# Altium PCB ToolDoorController_edge.PcbDoc
Units mm, origin at the board's own origin, x right, y up, seen from the top; angles counter-clockwise.
Board outline 70 x 120 mm, 2 copper layers (Top Layer, Bottom Layer); 35 components, 53 nets, 280 pads, 295 vias.
Unrouted connection lines stored in the file: 57.
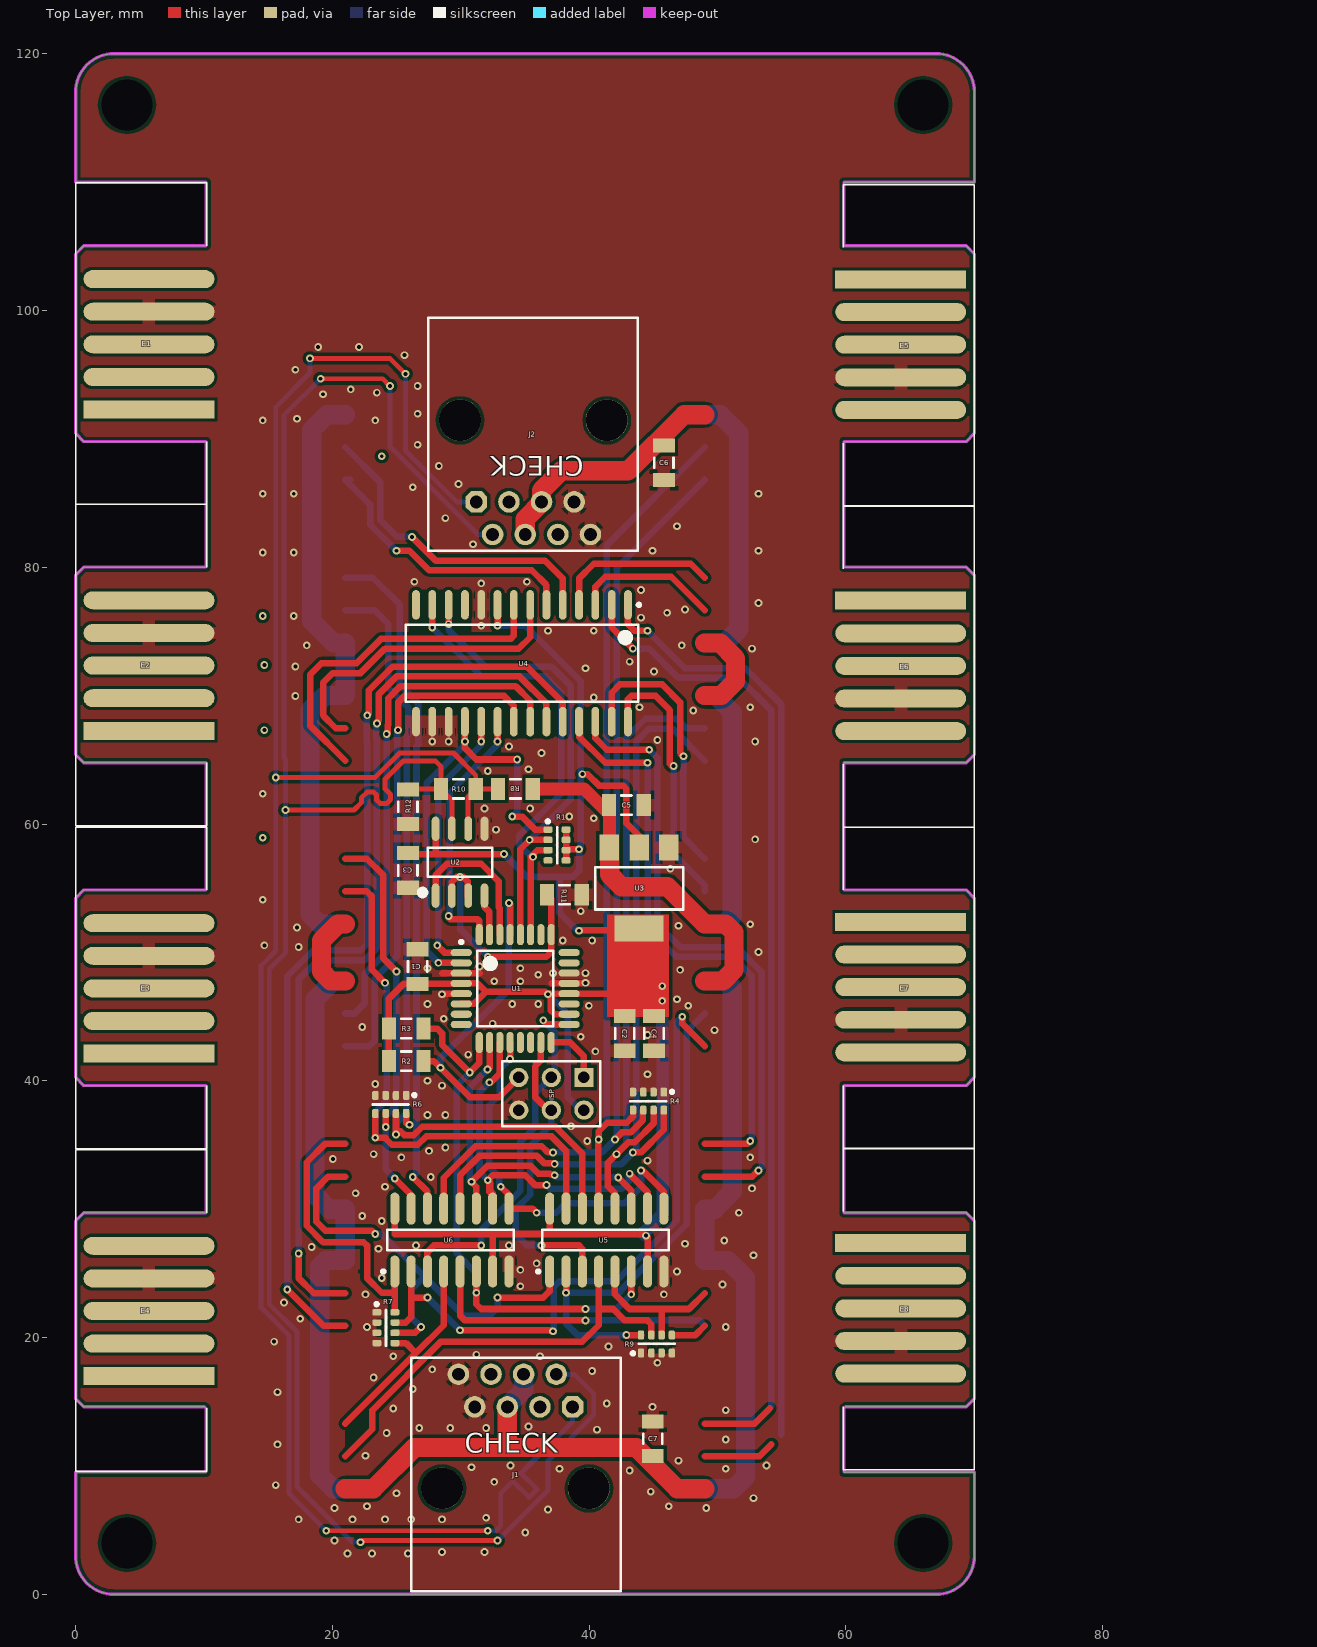
[diagram p0: Top Layer view]
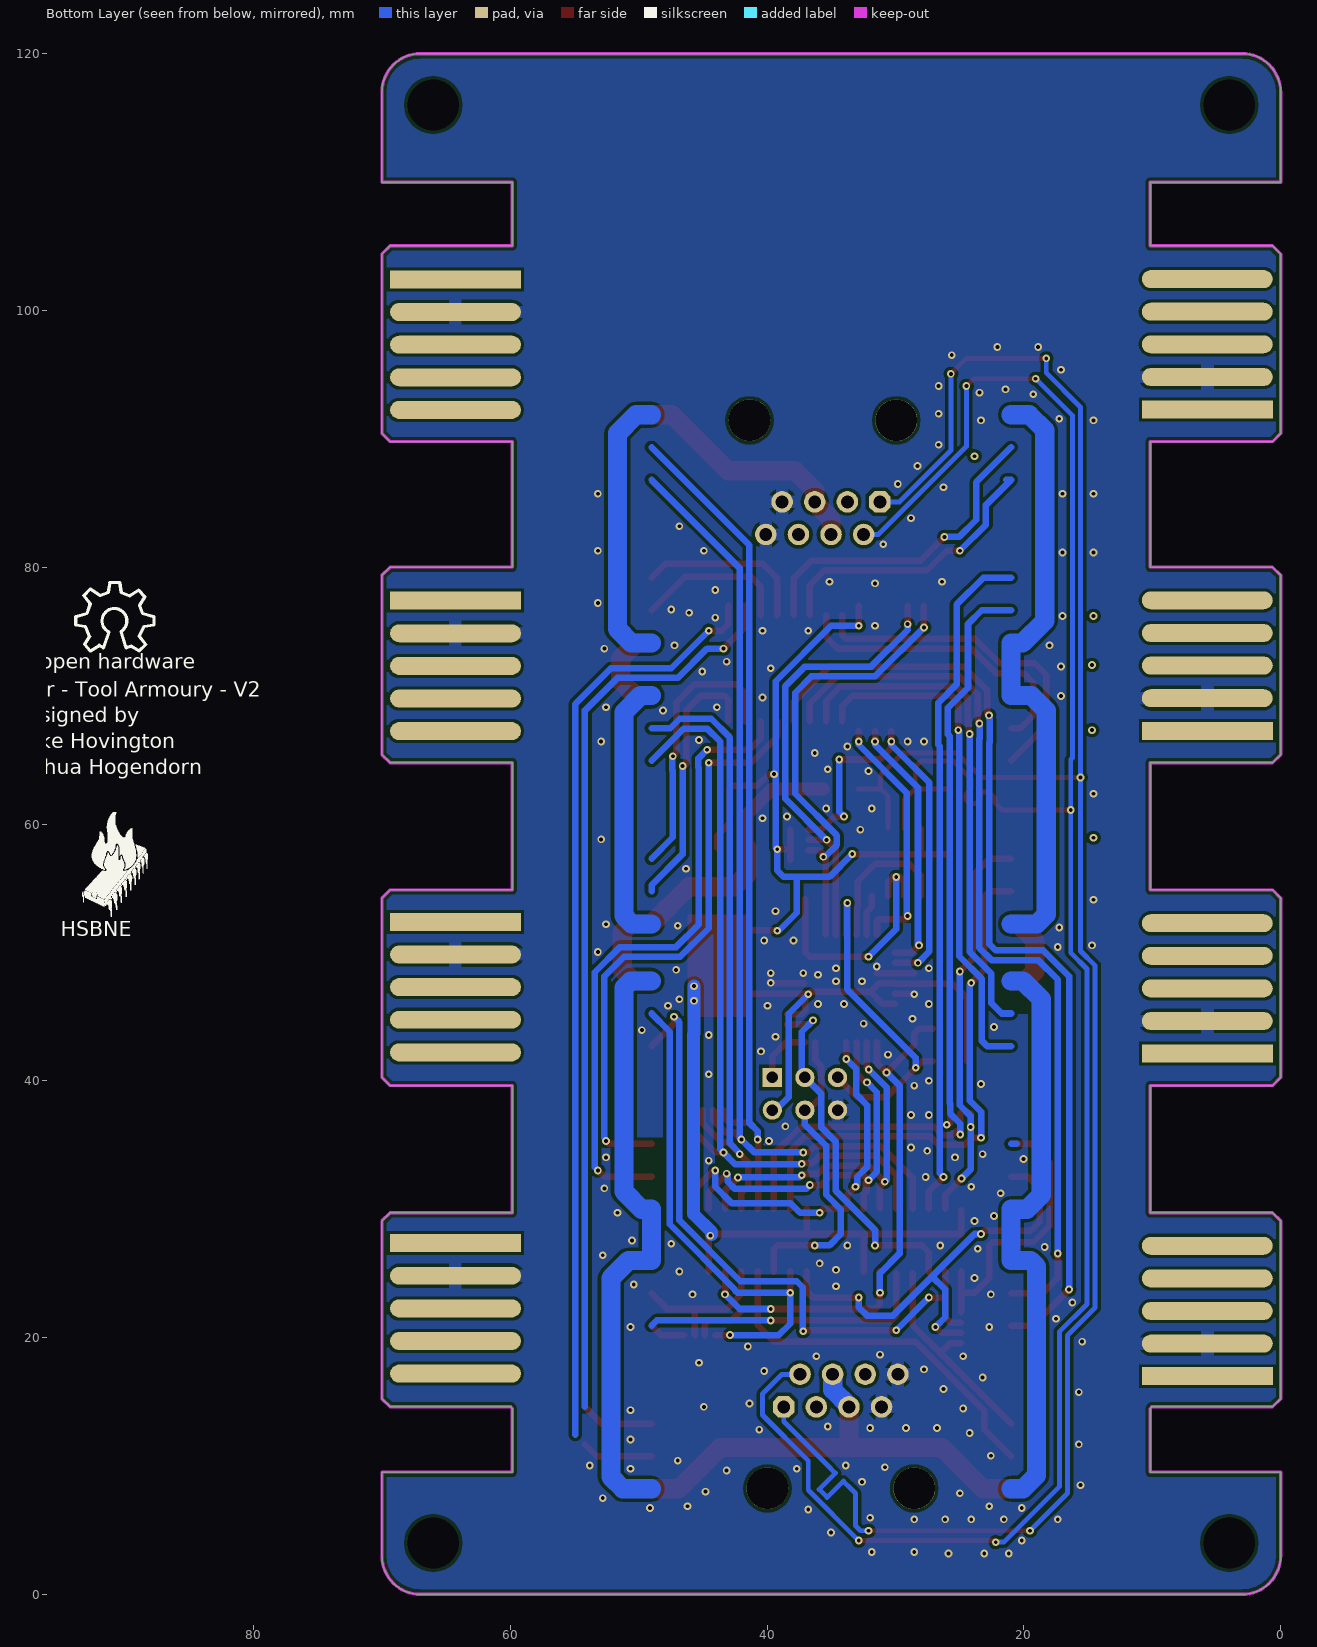
[diagram p1: Bottom Layer view, seen from below]

## Layer stack, top to bottom
Top Solder: solder mask 0.0102, Solder Resist, Dk 3.5
Top Layer: signal copper 0.0356
Dielectric1: dielectric 0.32, FR-4, Dk 4.8
Bottom Layer: signal copper 0.0356
Bottom Solder: solder mask 0.0102, Solder Resist, Dk 3.5

## Board outline
0.635,14.605 0,15.24 0,29.083 0.635,29.718 10.16,29.718 10.16,39.624 0.635,39.624 0,40.259 0,54.229 0.635,54.864 10.16,54.864 10.16,64.77 0.635,64.77 0,65.405 0,79.375 0.635,80.01 10.16,80.01 10.16,89.789 0.635,89.789 0,90.424 0,104.394 0.635,105.029 10.16,105.029 10.16,109.982 0,109.982 0,117 cw(c3,117) 3,120 67,120 cw(c67,117) 70,117 70,109.982 59.84,109.982 59.84,105.029 69.365,105.029 70,104.394 70,90.424 69.365,89.789 59.84,89.789 59.84,80.01 69.365,80.01 70,79.375 70,65.405 69.365,64.77 59.84,64.77 59.84,54.864 69.365,54.864 70,54.229 70,40.259 69.365,39.624 59.84,39.624 59.84,29.718 69.365,29.718 70,29.083 70,15.24 69.365,14.605 59.967,14.605 59.84,14.478 59.84,9.525 70,9.525 70,3 cw(c67,3) 67,0 3,0 cw(c3,3) 0,3 0,9.525 10.16,9.525 10.16,14.478 10.033,14.605

## Design rules (kind name [scope] priority, off if disabled: settings)
Clearance [All] p1: gap=0.25
DiffPairsRouting [All] p1: maxlimit=0.254 minlimit=0.254 mostfreqgap=0.254 toplayer_minwidth=0.381 toplayer_maxwidth=0.381 toplayer_prefwidth=0.381 bottomlayer_minwidth=0.381 bottomlayer_maxwidth=0.381 bottomlayer_prefwidth=0.381 maxuncoupledlength=12.7
HoleSize [All] p1: absolutevalues=TRUE maxlimit=4 minlimit=0.3 maxpercent=80.000 minpercent=20.000
MatchedLengths [InDifferentialPair('RS485')] p1: tolerance=2 checknetsindiffpair=FALSE checkdiffpairvsdiffpair=TRUE checkxsignals=TRUE checkothers=TRUE
MinimumSolderMaskSliver [(InComponent('U1') OR InComponent('U4') OR InComponent('Y1'))] p1: minsoldermaskwidth=0.045
MinimumSolderMaskSliver MinimumSolderMaskSliver_1 [All] p2: minsoldermaskwidth=0.25
PolygonConnect PolygonConnect_1 [isvia] p1: connectstyle=Direct reliefconductorwidth=0.254 reliefentries=4 polygonreliefangle="90 Angle" airgapwidth=0.254
PolygonConnect [All] p2: connectstyle=Relief reliefconductorwidth=1 reliefentries=4 polygonreliefangle="90 Angle" airgapwidth=0.254
RoutingVias [All] p1: holewidth=0.3 width=0.5 viastyle="Through Hole" minholewidth=0.2 minwidth=0.5 maxholewidth=0.711 maxwidth=1.27
SilkToSolderMaskClearance [IsPad] p1 off: minsilkscreentomaskgap=0.254 clearancetoexposedcopper=TRUE
SolderMaskExpansion [All] p1: expansion=0.102
Width [All] p1: maxlimit=1.5 minlimit=0.254 preferedwidth=0.508 minimp=50.000000 maximp=50.000000 favimp=50.000000
26 further rules are at their usual default settings.

## Classes and differential pairs
differential pair RS485: +RS485_P -RS485_N

## Components (designator, comment, footprint, x,y, rotation, side; value= is the part's Value field where it differs from the comment)
C1 "100nF" C1206 26.637,48.895 r270 top
C2 "100nF" C1206 42.766,43.688 r90 top
C3 "100nF" C1206 25.875,56.388 r90 top
C4 "1uF" C1206 45.052,43.688 r90 top
C5 "1uF" C1206 42.893,61.468 r180 top
C6 "100nF" C1206 45.814,88.138 r90 top
C7 "100nF" C1206 44.944,12.121 r270 top
E1 "Header 2x5" "CARDEDGE CWR-170-10" 0,89.789 r90 top
E2 "Header 2x5" "CARDEDGE CWR-170-10" 0,64.77 r90 top
E3 "Header 2x5" "CARDEDGE CWR-170-10" 0,39.624 r90 top
E4 "Header 2x5" "CARDEDGE CWR-170-10" 0,14.5 r90 top
E5 "Header 2x5" "CARDEDGE CWR-170-10" 69.977,104.902 r270 top
E6 "Header 2x5" "CARDEDGE CWR-170-10" 69.977,79.883 r270 top
E7 "Header 2x5" "CARDEDGE CWR-170-10" 69.977,54.864 r270 top
E8 "Header 2x5" "CARDEDGE CWR-170-10" 69.977,29.845 r270 top
ISP "ISP" HDR2X3 39.591,40.259 r180 top
J1 "rs485" RJ45 34.257,8.255 r0 top
J2 "rs485" RJ45 35.654,91.44 r180 top
R1 "10K" SO8_S 36.797,59.563 r0 top
R2 "10K" C1206 25.748,41.529 r180 top
R3 "10K" C1206 25.748,44.069 r180 top
R4 "10K" SO8_S 45.814,39.116 r270 top
R6 "10K" SO8_S 25.748,38.862 r270 top
R7 "10K" SO8_S 23.462,21.971 r0 top
R8 "390R" C1206 34.257,62.738 r0 top
R9 "10K" SO8_S 44.036,18.796 r90 top
R10 "220R" C1206 29.812,62.738 r0 top
R11 "10K" C1206 38.067,54.483 r180 top
R12 "390R" C1206 25.875,61.341 r90 top
U1 "ATmega8-16AC" 32A_N 34.238,47.184 r0 top
U2 "MAX14770EESA+" 8S1_L 29.939,57.023 r90 top
U3 "AZ1117EH-5" SOT-223 46.195,58.166 r180 top
U4 "MCP23017-E/SO" SOIC-SO28_N 34.765,72.517 r270 top
U5 "8-channel multiplexer" 16S1_M 36.924,25.146 r90 top
U6 "8-channel multiplexer" 16S1_M 24.859,25.146 r90 top

## Footprints (in the part's own frame and the unit in brackets; to place one, negate y for a bottom-side part, rotate by r counter-clockwise, add the part's x,y. Pads: shape width x height; smd on the part's side, far side on the other; paste and mask are expansions set on the pad)
8S1_L [mm] "SOIC, 8-Leads, Body 4.9x3.9mm, Pitch 1.27mm, IPC High Density"
  oval 1.9x0.6 smd: 1(-2.604,1.905) 2(-2.604,0.635) 3(-2.604,-0.635) 4(-2.604,-1.905) 5(2.604,-1.905) 6(2.604,-0.635) 7(2.604,0.635) 8(2.604,1.905)
  silkscreen extent -2.56,-2.5 1.14,3.12, body extent -2,-2.5 2,2.5, height 1.75
16S1_M [mm] "SOIC, 14-Leads, Body 8.7x3.9mm, Pitch 1.27mm, IPC Low Density"
  oval 2.5x0.7 smd: 1(0,0) 2(0,-1.27) 3(0,-2.54) 4(0,-3.81) 5(0,-5.08) 6(0,-6.35) 7(0,-7.62) 8(0,-8.89) 9(4.9,-8.89) 10(4.9,-7.62) 11(4.9,-6.35) 12(4.9,-5.08) 13(4.9,-3.81) 14(4.9,-2.54) 15(4.9,-1.27) 16(4.9,0)
  silkscreen extent -0.12,-9.27 3.25,1.02, body extent 0.45,-9.4 4.45,0.57, height 1.75
32A_N [mm] "Thin QFP, 32-Leads, Body 7x7mm, Pitch 0.8mm, IPC Medium Density"
  oval 1.65x0.55 smd: 1(-4.2,2.8) 2(-4.2,2) 3(-4.2,1.2) 4(-4.2,0.4) 5(-4.2,-0.4) 6(-4.2,-1.2) 7(-4.2,-2) 8(-4.2,-2.8) 17(4.2,-2.8) 18(4.2,-2) 19(4.2,-1.2) 20(4.2,-0.4) 21(4.2,0.4) 22(4.2,1.2) 23(4.2,2) 24(4.2,2.8)
  oval 0.55x1.65 smd: 9(-2.8,-4.2) 10(-2,-4.2) 11(-1.2,-4.2) 12(-0.4,-4.2) 13(0.4,-4.2) 14(1.2,-4.2) 15(2,-4.2) 16(2.8,-4.2) 25(2.8,4.2) 26(2,4.2) 27(1.2,4.2) 28(0.4,4.2) 29(-0.4,4.2) 30(-1.2,4.2) 31(-2,4.2) 32(-2.8,4.2)
  silkscreen extent -4.32,-2.95 2.95,3.75, body extent -3.5,-3.5 3.5,3.5, height 1.2
C1206 [mm] "Chip Capacitor, Body 3.2x1.6mm, IPC High Density"
  rect 1.1x1.7 smd: 1(-1.35,0) 2(1.35,0)
  silkscreen extent -0.4,-0.75 0.4,0.75, body extent -1.7,-0.9 1.7,0.9, height 1.3
"CARDEDGE CWR-170-10" [mm]
  rect 1.4x10.2 smd: A1(2.49,-5.715)
  oval 1.4x10.2 smd: A2(5.03,-5.715) A3(7.57,-5.715) A4(10.11,-5.715) A5(12.65,-5.715)
  rect 1.4x10.2 smd far side: B1(2.49,-5.715)
  oval 1.4x10.2 smd far side: B2(5.03,-5.715) B3(7.57,-5.715) B4(10.11,-5.715) B5(12.65,-5.715)
  silkscreen extent -4.9,-10.2 20.14,0
HDR2X3 [mm] "Connector; Header; 3x2 Position"
  rect 1.5x1.5 hole 0.9: 1(0,0)
  round 1.5 hole 0.9: 2(0,2.54) 3(2.54,0) 4(2.54,2.54) 5(5.08,0) 6(5.08,2.54)
  silkscreen extent -1.27,-1.27 6.35,3.81
RJ45 [mil] "609-5081-ND"
  oct 66x66 hole 39.37: 1(175.04,250)
  round 66 hole 39.37: 2(125.04,350) 3(75.04,250) 4(25.04,350) 5(-24.96,250) 6(-74.96,350) 7(-124.96,250) 8(-174.96,350)
  round 127.95 hole 127.95 unplated: ""(-225.04,0) ""(225.04,0)
  silkscreen extent -320,-315 323,400, body extent -295,-314 303,394, height 452
SO8_S [mm] "SOIC, 8-Leads, Body 4.9x3.9mm, Pitch 1.27mm, IPC Low Density"
  rrect50% 0.7x0.5 smd: 1(0,0) 2(0,-0.8) 3(0,-1.6) 4(0,-2.4) 5(1.4,-2.4) 6(1.4,-1.6) 7(1.4,-0.8) 8(1.4,0)
  silkscreen extent -0.15,-2.62 0.71,0.76, body extent -0.05,-2.88 1.43,0.58, height 0.53
SOIC-SO28_N [mm] "SOIC, 28-Leads, Body 17.9x7.5mm, Pitch 1.27mm, IPC Medium Density"
  oval 2.3x0.6 smd: 1(-4.55,8.255) 2(-4.55,6.985) 3(-4.55,5.715) 4(-4.55,4.445) 5(-4.55,3.175) 6(-4.55,1.905) 7(-4.55,0.635) 8(-4.55,-0.635) 9(-4.55,-1.905) 10(-4.55,-3.175) 11(-4.55,-4.445) 12(-4.55,-5.715) 13(-4.55,-6.985) 14(-4.55,-8.255) 15(4.55,-8.255) 16(4.55,-6.985) 17(4.55,-5.715) 18(4.55,-4.445) 19(4.55,-3.175) 20(4.55,-1.905) 21(4.55,-0.635) 22(4.55,0.635) 23(4.55,1.905) 24(4.55,3.175) 25(4.55,4.445) 26(4.55,5.715) 27(4.55,6.985) 28(4.55,8.255)
  silkscreen extent -4.67,-9.05 3,9.23, body extent -3.8,-9.05 3.8,9.05, height 2.65
SOT-223 [mil]
  rect 60x80 smd: 1(0,0) 2(91,0) 3(182,0)
  rect 150x80 smd: 4(91,248)
  silkscreen extent -45,60 225,190, body extent -38,-7 218,267, height 63

## Part data
C1 C2 C3 C6 C7: library part "Cap 100nF", "Capacitor (Semiconductor SIM Model)"
C4 C5: library part "Cap 1uF", "Capacitor (Semiconductor SIM Model)"
E1 E2 E3 E4 E5 E6 E7 E8: "Header"
ISP: library part "Header 3X2", "Header, 3-Pin, Dual row"
J1 J2: library part rj45, "rj45"
R1 R4 R6 R7 R9: library part "Resistor Pack", "Isolated Resistor Network - Parts"
R2 R3 R11: library part Resistor-10K, "Resistor"
R8 R12: library part Resistor-390R, "Resistor"
R10: library part Resistor-220R, "Resistor"
U1: "8-Bit AVR Microcontroller with 8K Bytes of In-System Programmable Flash Memory"
U2: "TXRX PROFIBUS RS-485 8-SOIC"
U3: library part AZ1117EH, "Reg 1A 5V OUT SIP VERT"
U4: library part CMP-0186-00161-2, "16-Bit I/O Expander with Serial Interface, 28-Pin SOIC, Extended Temperature"
U5 U6: "8-channel analog multiplexer/demultiplexer"

## Free pads (board coordinates)
  round 1.524 hole 4 unplated: ""(4,4) ""(4,116) ""(66,4) ""(66,116)

## Via types
v1: diameter 0.6, hole 0.3, Top Layer to Bottom Layer, tented both sides, 295 vias

## Nets (pads, with @x,y where several pads share a name; then routed paths per layer and width w, separated by ;. In a path a pad name is that pad's centre, name@x,y a point inside that pad or via, vN(x,y) a via of type N, cw(c..) or ccw(c..) an arc to the next point about the centre after c; other vN are vias at no path point)
5V: C1.2 C2.2 C3.2 C4.2 ISP.2 R1.5 R1.6 R1.7 R1.8 R2.2 R3.2 U1.4 U1.6 U1.18 U1.20 U2.8 U3.2 U3.4 U4.9 U5.7 U5.16 U6.7 U6.16 | length 150.9
  Top Layer w0.508: R2.2 R3.2 24.398,46.402 25.541,47.545 27.399,47.545 27.399,47.563 30.017,47.563 U1.4 31.298,47.584 31.952,46.93 ; U6.16@24.859,29.919 24.859,28.067 32.479,28.067 ; C3.2 25.955,57.658 28.034,57.658 ; U2.8 28.034,57.658 ; U1.6 31.006,45.984 31.952,46.93 ; U6.7 32.479,28.067 ; v1(32.86,75.438) U4.9@32.86,77.017 ; v1(33.368,57.658) 28.034,57.658 ; U5.16 36.924,28.067 ; R1.5 R1.8 ; R1.6@38.273,58.039 v1(39.21,58.039) ; U1.18 37.31,45.184 37.024,45.47 37.024,46.48 v1@36.778,46.726 ; v1(39.21,51.689) 39.252,51.731 41.665,51.731 ; v1(39.464,63.881) 39.868,63.881 40.757,62.992 42.639,62.992 42.893,62.738 42.893,60.071 43.884,59.08 U3.2 ; 43.086,46.784 U1.20 36.836,46.784 v1@36.778,46.726 ; U5.7 44.544,27.813 v1(44.417,27.94) 44.29,28.067 36.924,28.067 ; 31.952,46.93 31.96,46.922 36.582,46.922 v1@36.778,46.726 ; 32.479,28.067 36.924,28.067
  Top Layer w1: v1(45.687,46.228) v1(45.687,47.371)
  Bottom Layer w0.508: v1(32.86,75.438) 35.019,75.438 39.333,71.124 v1@39.333,63.881 ; v1(33.368,57.658) 35.146,55.88 37.686,55.88 ; v1(36.797,46.736) 38.321,45.212 38.321,38.735 39.337,37.719 ISP.2 ; v1(39.21,51.689) 39.083,51.689 37.686,53.086 37.686,55.88 ; v1(39.464,63.881) v1@39.333,63.881 ; 37.686,55.88 38.702,55.88 39.21,56.388 v1(39.21,58.039) 39.333,58.162 v1@39.333,63.881
  Bottom Layer w1: v1@44.317,28.04 44.317,28.221 45.724,29.628 45.724,43.652 45.687,43.69 v1(45.687,46.228) v1(45.687,47.371)
12V: C5.2 C6.2 C7.2 E1.A3 E1.B3 E2.A3 E2.B3 E3.A3 E3.B3 E4.A3 E4.B3 E5.A3 E5.B3 E6.A3 E6.B3 E7.A3 E7.B3 E8.A3 E8.B3 J1.4 J1.5 J2.4 J2.5 R8.2 U3.3 | length 232.7
  Top Layer w1: R8.2 39.591,62.738 41.572,60.757 U3.3
  Top Layer w1.5: 21,8.22 23.173,8.22 26.383,11.43 33.622,11.43 ; 21,47.78 19.878,47.78 19.144,48.514 19.144,50.927 20.437,52.22 21,52.22 ; J1.5 33.623,11.431 33.622,11.43 ; J2.4 35.018,83.76 36.288,85.03 J2.5 36.288,85.978 37.813,87.503 43.02,87.503 47.397,91.88 49,91.88 ; U3.3 41.572,56.058 42.512,55.118 46.102,55.118 49,52.22 50.617,52.22 51.275,51.562 51.275,48.641 50.414,47.78 49,47.78 ; 49,8.22 46.865,8.22 43.655,11.43 33.622,11.43
  Bottom Layer w1.5: 21,8.22 20.068,8.22 19.017,9.271 19.017,25.527 19.49,26 21,26 21,30 19.751,30 18.636,31.115 18.636,46.355 20.061,47.78 21,47.78 ; 21,52.22 18.994,52.22 18.255,52.959 18.255,68.834 19.421,70 21,70 21,74.1 20.101,74.1 18.382,75.819 18.382,90.678 19.584,91.88 21,91.88 ; J1.5 33.623,14.665 34.893,15.935 J1.4 ; 49,8.22 51.24,8.22 52.164,9.144 52.164,24.638 50.802,26 49,26 49,30 49.779,30 51.148,31.369 51.148,47.244 50.612,47.78 49,47.78
  other v1: 23.843,88.646
COM_TR: R11.2 U1.25 U2.2 U2.3 | length 20.1
  Top Layer w0.508: U2.2 29.304,55.499 29.685,55.88 v1(29.939,55.88) 30.193,55.88 30.549,55.524 30.549,54.394 U2.3 ; v1(32.098,49.657) 36.67,49.657 37.038,50.025 U1.25 R11.2@37.038,54.169
  Bottom Layer w0.508: v1(29.939,55.88) 29.939,51.816 v1(32.098,49.657)
DR1: E1.A1 U4.5 | length 25.8
  Top Layer w0.508: v1(26.193,82.359) 28.034,80.518 36.543,80.518 37.94,79.121 U4.5@37.94,76.255
  Bottom Layer w0.508: 21,89.34 23.712,86.628 23.712,83.697 25.05,82.359 v1(26.193,82.359)
DR2: E2.A1 U4.7 | length 24
  Top Layer w0.508: 21,67.46 20.264,67.46 19.271,68.453 19.271,70.997 20.033,71.759 22.196,71.759 24.097,73.66 34.511,73.66 35.4,74.549 U4.7@35.4,76.255
DR3: E3.A1 U4.22 | length 39.9
  Top Layer w0.508: v1(24.224,67.006) 24.309,67.091 24.309,67.685 24.351,67.727 24.351,68.199 24.355,68.203 24.355,69.783 25.311,70.739 34.257,70.739 35.4,69.596 U4.22@35.4,68.017
  Bottom Layer w0.508: 21,45.24 21.724,45.24 22.535,46.051 22.535,48.349 24.224,50.038 v1(24.224,67.006)
DR4: E4.A1 U4.23 | length 70.2
  Top Layer w0.508: v1(17.366,26.543) 17.366,24.638 18.544,23.46 21,23.46 ; v1(23.466,67.822) 23.466,67.956 23.593,68.083 23.593,70.093 24.997,71.497 34.571,71.497 36.67,69.398 U4.23@36.67,68.017
  Bottom Layer w0.508: v1(17.366,26.543) 17.366,47.879 18.89,49.403 22.517,49.403 23.466,50.352 23.466,66.627 23.42,66.673 23.42,67.776 v1(23.466,67.822)
DR5: E5.A1 U4.3 | length 12.1
  Top Layer w0.508: U4.3@40.48,76.255 40.48,78.486 41.242,79.248 46.392,79.248 49,76.64
DR6: E6.A1 U4.28 | length 20.8
  Top Layer w0.508: U4.28@43.02,68.017 43.02,69.723 43.274,69.977 45.179,69.977 46.28,68.876 46.28,64.685 46.449,64.516 v1(46.576,64.516)
  Bottom Layer w0.508: v1(46.576,64.516) 46.58,64.512 46.58,57.654 49,55.234 49,54.76
DR7: E7.A1 U4.26 | length 49.4
  Top Layer w0.508: U4.26@40.48,68.017 40.48,66.675 41.369,65.786 v1(44.671,65.786) ; 49,32.54 52.7,32.54 v1(53.18,33.02)
  Bottom Layer w0.508: v1(44.671,65.786) 44.671,65.78 45.348,65.103 45.348,64.437 45.306,64.395 45.306,52.197 47.088,50.415 51.462,50.415 53.43,48.447 53.43,33.27 v1(53.18,33.02)
DR8: E8.A1 U4.1 | length 72.9
  Top Layer w0.508: U4.1@43.02,77.017 43.02,75.565 43.528,75.057 v1(44.544,75.057)
  Bottom Layer w0.508: v1(44.544,75.057) 44.544,75.044 47.456,72.132 52.155,72.132 54.946,69.341 54.946,12.434
GND: C1.1 C2.1 C3.1 C4.1 C5.1 C6.1 C7.1 E1.A4 E1.B2 E2.A4 E2.B2 E3.A4 E3.B2 E4.A4 E4.B2 E5.A4 E5.B2 E6.A4 E6.B2 E7.A4 E7.B2 E8.A4 E8.B2 ISP.6 J1.7 J1.8 J2.7 J2.8 R4.1 R4.2 R4.3 R4.4 R6.1 R6.2 R6.3 R6.4 R7.1 R7.2 R7.3 R7.4 R9.1 R9.2 R9.3 R9.4 R11.1 R12.1 U1.3 U1.5 U1.21 U1.22 U2.5 U3.1 U4.10 U4.15 U4.16 U4.17 U5.8 U6.8 | length 7.1
  Top Layer w0.508: 28.542,48.38 30.038,48.38 U1.3 31.46,48.384 31.463,48.387 ; v1@28.669,46.736 28.717,46.784 U1.5 ; 37.092,47.584 U1.21 39.804,47.584 v1@39.845,47.625
  other v1: 21.176,3.175 23.081,3.175 25.875,3.175 28.542,3.302 31.844,3.302 20.16,4.191 35.019,4.826 17.366,5.842 21.557,5.842 24.097,5.842 26.129,5.842 28.542,5.842 31.971,5.969 36.797,6.604 20.16,6.731 49.116,6.731 22.7,6.858 46.195,6.858 52.799,7.493 24.986,7.874 44.798,8.001 15.588,8.509 32.606,8.763 43.147,9.652 37.686,9.779 50.64,9.779 30.828,9.906 33.876,10.033 53.815,10.033 46.957,10.414 22.573,10.795 15.715,11.684 50.64,12.065 24.224,12.573 40.607,12.827 26.764,12.954 29.177,12.954 31.971,12.954 35.273,13.081 50.64,14.351 24.732,14.478 44.925,14.605 41.369,14.859 15.715,15.748 26.256,16.002 23.208,16.891 40.226,17.399 27.78,17.526 45.306,18.034 24.732,18.542 36.162,18.542 31.209,18.669 41.496,19.304 15.461,19.685 22.7,20.828 50.64,20.828 17.493,21.463 16.223,22.733 22.573,23.368 45.814,23.368 34.638,24.003 50.386,24.13 23.843,24.638 46.83,25.146 34.638,25.273 35.908,25.781 52.799,26.416 23.589,26.924 18.382,27.051 26.51,27.178 33.749,27.178 47.465,27.305 50.513,27.559 23.843,29.083 22.319,29.464 51.656,29.718 21.811,31.242 52.672,31.623 24.097,31.75 27.653,32.512 44.544,33.782 20.033,33.909 25.367,34.036 52.545,34.036 23.208,34.29 27.526,34.544 28.796,34.798 39.845,35.306 38.575,36.449 27.399,37.338 28.796,37.338 28.542,39.624 23.335,39.751 27.399,40.005 44.544,40.513 30.574,42.037 40.48,42.291 39.337,43.434 44.544,43.561 49.751,43.942 22.319,44.196 32.479,44.45 28.669,44.831 39.972,45.847 47.719,45.847 27.399,45.974 34.003,45.974 36.035,45.974 46.83,46.355 28.542,46.736 39.718,47.625 32.606,47.752 34.638,47.752 36.035,48.26 37.178,48.387 39.718,48.387 47.084,48.641 27.399,48.768 34.638,48.768 31.463,48.895 53.18,50.038 17.366,50.419 14.699,50.546 37.94,50.927 40.226,50.927 17.239,51.943 46.957,52.07 52.545,52.197 39.337,53.213 14.572,54.102 46.322,56.515 52.926,58.801 32.733,59.563 40.353,60.452 38.448,60.579 31.844,61.214 35.4,61.214 14.572,62.357 32.098,64.135 35.273,64.262 36.289,65.532 33.749,66.04 27.78,66.421 29.05,66.421 52.926,66.421 45.306,66.548 48.1,68.834 43.909,69.088 52.545,69.088 40.353,69.85 17.112,69.977 45.052,71.882 39.718,72.136 17.112,72.263 43.147,72.644 52.672,73.66 18.001,73.914 47.211,73.914 36.797,75.057 40.353,75.057 31.59,75.438 44.036,76.073 16.985,76.2 46.068,76.454 47.465,76.708 53.18,77.216 44.036,78.232 31.59,78.74 26.383,78.867 35.146,78.867 14.572,81.153 16.985,81.153 44.925,81.28 53.18,81.28 30.955,81.788 46.83,83.185 28.796,83.82 14.572,85.725 16.985,85.725 53.18,85.725 26.256,86.233 29.812,86.487 28.288,87.884 26.637,89.535 14.572,91.44 23.335,91.44 17.239,91.567 26.637,91.948 19.271,93.472 23.462,93.599 21.43,93.853 26.637,94.107 17.112,95.377 25.621,96.52 18.89,97.155 22.065,97.155
I\O\R\E\S\E\T: R1.1 U1.2 U4.18 | length 34.2
  Top Layer w0.508: v1(28.253,49.184) U1.2 ; U4.18@30.32,67.255 v1(30.32,66.421) 30.32,65.913 31.209,65.024 v1(34.384,65.024) ; v1(34.003,60.579) 34.765,60.579 35.781,59.563 R1.1
  Bottom Layer w0.508: v1(28.253,49.184) 27.357,50.08 27.357,63.204 30.32,66.167 v1(30.32,66.421) ; v1(34.003,60.579) 34.384,60.96 v1(34.384,65.024)
INH: R3.1 U1.9 U5.6 U6.6 | length 43.4
  Top Layer w0.508: R3.1 28.161,44.069 28.542,43.688 28.542,42.799 v1(30.701,40.64) 31.438,41.377 U1.9 ; U6.6 v1(31.209,23.495) 31.209,22.602 31.586,22.225 v1(39.718,22.225) ; v1(43.274,23.368) U5.6
  Bottom Layer w0.508: v1(30.701,40.64) 29.685,39.624 29.685,26.543 31.209,25.019 v1(31.209,23.495) ; v1(39.718,22.225) 42.131,22.225 v1(43.274,23.368)
INTA: U1.32 U4.20 | length 19.7
  Top Layer w0.508: v1(29.05,52.832) 29.05,52.705 29.177,52.578 31.336,52.578 31.438,52.476 U1.32 ; v1(32.86,66.421) U4.20@32.86,67.255
  Bottom Layer w0.508: v1(29.05,52.832) 29.135,52.917 29.135,62.442 32.86,66.167 v1(32.86,66.421)
INTB: U1.1 U4.19 | length 20.2
  Top Layer w0.508: v1(28.161,50.546) 28.723,49.984 U1.1 ; v1(31.59,66.421) U4.19@31.59,67.255
  Bottom Layer w0.508: v1(28.161,50.546) 28.246,50.631 28.246,62.823 31.59,66.167 v1(31.59,66.421)
LD1: E1.B5 R6.7 U5.14 | length 66.4
  Top Layer w0.508: R6.7@24.952,37.462 v1(24.952,35.814) 25.206,36.068 25.311,36.068 25.607,35.772 26.335,35.772 26.988,36.425 37.379,36.425 39.464,34.34 U5.14
  Bottom Layer w0.508: 21,76.64 23.28,76.64 24.351,75.569 24.351,70.612 25.917,69.046 25.917,66.977 25.79,66.85 25.79,38.269 25.744,38.223 25.744,37.455 24.952,36.663 v1(24.952,35.814)
LD2: E2.B5 R6.5 U5.15 | length 44.1
  Top Layer w0.508: 21,54.76 22.681,54.76 23.081,54.36 23.081,48.641 v1(24.097,47.625) ; R6.5@23.335,37.449 v1(23.335,35.56) 24.148,35.56 24.148,35.481 24.619,35.01 25.285,35.01 25.291,35.016 25.293,35.014 26.649,35.014 27.302,35.667 37.065,35.667 38.194,34.538 U5.15
  Bottom Layer w0.508: v1(23.335,35.56) 23.335,37.588 24.228,38.481 24.228,47.494 v1(24.097,47.625)
LD3: E3.B5 R7.6 U5.1 | length 36.1
  Top Layer w0.508: 21,32.54 19.68,32.54 18.759,31.619 18.759,29.016 19.454,28.321 23.081,28.321 v1(23.335,28.067) ; R7.6 26.434,20.371 v1(26.891,20.828) ; v1(32.86,23.114) 36.416,23.114 36.924,23.622 U5.1
  Bottom Layer w0.508: v1(23.335,28.067) 23.843,28.067 27.145,24.765 ; v1(26.891,20.828) 26.129,21.59 26.129,23.749 27.145,24.765 ; v1(32.86,23.114) 32.86,22.352 32.225,21.717 30.193,21.717 27.145,24.765
LD4: E4.B5 R9.7 U5.4 | length 34.4
  Top Layer w0.508: 21,10.76 23.102,12.862 23.102,14.33 28.457,19.685 39.464,19.685 40.734,20.955 U5.4 ; 40.734,22.225 41.877,22.225 42.766,21.336 44.544,21.336 44.836,21.044 R9.7
LD5: E5.B5 U5.13 | length 67
  Top Layer w0.508: U5.13 40.696,30.084 40.696,35.395 v1(40.734,35.433) 40.734,36.068 41.403,36.737 42.927,36.737 43.414,37.224 43.414,37.716
  Bottom Layer w0.508: v1(40.734,35.433) 40.734,36.068 41.373,36.707 41.373,36.763 41.381,36.771 41.381,81.721 49,89.34
LD6: E6.B5 R4.7 U5.12 | length 49.4
  Top Layer w0.508: U5.12 42.004,31.238 41.454,31.788 41.454,33.621 43.054,35.221 43.555,35.221 45.014,36.68 R4.7
  Bottom Layer w0.508: v1(42.131,34.29) 42.131,34.361 42.897,35.127 42.897,66.735 44.357,68.195 46.797,68.195 47.532,67.46 49,67.46
LD7: E7.B5 R9.8 U5.2 | length 38.8
  Top Layer w0.508: v1@38.194,23.622 U5.2 ; v1(42.893,20.193) 42.896,20.196 R9.8
  Bottom Layer w0.508: v1(42.893,20.193) 39.083,20.193 38.194,21.082 v1(38.194,23.495) 42.329,23.495 42.47,23.636 42.47,23.701 47.588,28.819 47.588,43.828 49,45.24
LD8: E8.B5 R9.6 U5.5 | length 11.7
  Top Layer w0.508: U5.5 42.004,23.368 43.147,22.225 47.765,22.225 49,23.46 ; R9.6 45.636,22.149
LK1: E1.A5 R6.8 U6.14 | length 54.5
  Top Layer w0.508: R6.8 25.748,36.703 25.875,36.576 v1(26.002,36.576) ; v1(26.256,32.512) 27.399,31.369 U6.14
  Bottom Layer w0.508: 21,79.18 23.149,79.18 25.24,77.089 25.24,70.866 26.675,69.431 26.675,66.167 26.548,66.04 26.548,32.804 v1(26.256,32.512)
LK2: E2.A5 R6.6 U6.15 | length 32.1
  Top Layer w0.508: 21,57.3 22.677,57.3 23.97,56.007 23.97,49.53 v1(24.986,48.514) ; v1(24.148,36.398) R6.6 ; v1(24.859,32.385) 26.129,31.115 U6.15
  Bottom Layer w0.508: v1(24.859,32.385) 24.148,33.096 v1(24.148,36.398) 24.148,37.262 24.986,38.1 v1(24.986,48.514)
LK3: E3.A5 R7.8 U6.1 | length 22.6
  Top Layer w0.508: 21,35.08 19.426,35.08 18.001,33.655 18.001,28.702 19.271,27.432 22.446,27.432 22.7,27.178 22.7,24.638 23.843,23.495 24.859,23.495 ; R7.8@24.859,21.974 24.859,23.495 ; U6.1 24.859,23.495
  Bottom Layer w0.508: 20.569,35.08 21,35.08
LK4: E4.A5 R7.5 U6.4 | length 16.9
  Top Layer w0.508: 21,13.3 26.496,18.796 ; R7.5 25.721,19.571 26.496,18.796 ; U6.4@28.669,25.019 28.669,20.969 26.496,18.796
LK5: E5.A5 R4.6 U6.13 | length 75.1
  Top Layer w0.508: U6.13 28.669,32.441 31.137,34.909 36.305,34.909 36.797,34.417 v1(37.178,34.417) ; v1(42.004,35.433) 42.55,35.979 43.241,35.979 44.172,36.91 44.172,37.674 R4.6
  Bottom Layer w0.508: v1(37.178,34.417) 40.988,34.417 v1(42.004,35.433) ; v1@42.131,35.56 42.131,36.449 42.139,36.457 42.139,79.939 49,86.8
LK6: E6.A5 R4.8 U6.12 | length 61
  Top Layer w0.508: U6.12 29.939,32.639 31.451,34.151 35.926,34.151 36.511,33.566 37.19,33.566 37.279,33.477 37.305,33.477 v1(37.305,33.528) ; v1(43.401,34.417) 44.036,34.417 45.814,36.195 R4.8
  Bottom Layer w0.508: v1(37.305,33.528) 37.347,33.486 42.47,33.486 v1(43.401,34.417) 43.655,34.671 43.655,66.421 44.671,67.437 46.483,67.437 49,64.92
LK7: E7.A5 R7.7 U6.2 | length 51.5
  Top Layer w0.508: R7.7 25.71,21.171 26.129,21.59 26.129,23.114 ; U6.2 26.129,23.114 ; v1(27.399,23.114) 26.129,23.114 ; v1(29.939,20.574) 37.093,20.574 v1(37.178,20.489) ; v1(47.244,44.991) 47.244,44.456 49,42.7
  Bottom Layer w0.508: v1(27.399,23.114) v1(29.939,20.574) ; v1(37.178,20.489) 37.22,20.447 37.22,23.918 37.686,24.384 42.081,24.384 46.83,29.133 46.83,44.576 v1(47.244,44.991)
LK8: E8.A5 R9.5 U6.5 | length 25.6
  Top Layer w0.508: U6.5@29.939,25.019 29.939,21.717 30.32,21.336 v1(39.718,21.336) ; R9.5 48.276,20.196 49,20.92
  Bottom Layer w0.508: v1(39.718,21.336) 48.584,21.336 49,20.92
M_A: U1.10 U5.11 U6.11 | length 29
  Top Layer w0.508: U6.11 31.209,31.75 v1(30.828,32.131) 32.09,33.393 35.412,33.393 36.043,32.762 36.922,32.762 36.965,32.719 37.225,32.719 v1(37.305,32.639) ; v1(32.084,40.88) 32.238,41.034 U1.10 ; v1(42.258,32.47) 43.274,31.454 U5.11
  Bottom Layer w0.508: v1(30.828,32.131) 30.697,32.262 30.697,39.493 v1(32.084,40.88) ; v1(37.305,32.639) 37.474,32.47 v1(42.258,32.47)
M_B: U1.11 U5.10 U6.10 | length 31
  Top Layer w0.508: v1(32.225,39.878) 32.352,39.878 33.034,40.56 33.034,42.98 U1.11 ; U6.10 U6.10@32.479,31.115 ; v1(36.67,31.877) 35.781,31.877 35.023,32.635 32.475,32.635 v1(32.098,32.258) v1@32.225,32.131 ; v1(43.147,32.766) 43.147,32.731 44.544,31.334 U5.10 ; v1@32.225,32.131 32.31,32.046 32.31,31.417 32.479,31.248 U6.10@32.479,31.115 ; v1@32.225,32.131 32.225,31.369 U6.10@32.479,31.115
  Bottom Layer w0.508: v1(32.098,32.258) 31.455,32.901 31.455,39.108 v1(32.225,39.878) ; v1(36.67,31.877) 36.966,31.581 42.506,31.581 43.062,32.137 43.062,32.681 v1(43.147,32.766)
M_C: U1.12 U5.9 U6.9 | length 30.6
  Top Layer w0.508: v1(33.114,31.75) 33.749,31.115 U6.9 35.58,30.046 v1(35.908,29.718) ; v1(33.838,41.694) U1.12 ; v1(44.036,33.02) 44.163,33.02 45.814,31.369 U5.9
  Bottom Layer w0.508: v1(33.114,31.75) 32.975,31.889 32.975,32.524 32.213,33.286 32.213,38.1 33.038,38.925 33.038,40.894 v1(33.838,41.694) ; v1(35.908,29.718) 37.432,29.718 38.194,30.48 42.766,30.48 44.036,31.75 v1(44.036,33.02)
MISO: ISP.1 U1.16 | length 4.6
  Top Layer w0.508: U1.16 38.517,42.984 39.591,41.91 ISP.1
MOSI: ISP.4 U1.15 U5.3 | length 24.4
  Top Layer w0.508: U1.15 36.238,41.605 35.781,41.148 35.781,38.735 36.797,37.719 ISP.4 ; v1(36.289,27.178) 39.21,27.178 39.464,26.924 U5.3
  Bottom Layer w0.508: v1(36.289,27.178) 35.146,27.178 34.263,28.061 34.263,29.978 35.4,31.115 35.4,34.925 37.051,36.576 ISP.4
RS485_N: J1.1 J2.1 R8.1 R10.2 U2.6 | length 168.2
  Top Layer w0.381: v1(15.588,63.627) 23.326,63.627 25.231,65.532 29.431,65.532 31.162,63.801 R10.2 ; v1(18.255,96.266) 24.478,96.266 v1(25.685,95.06) ; v1(19.525,4.953) v1(32.098,4.953) ; U2.6 30.574,62.15 R10.2 ; R8.1 R10.2
  Bottom Layer w0.381: v1(18.255,96.266) 18.255,95.132 15.588,92.465 v1(15.588,63.627) 15.588,50.112 14.445,48.969 14.445,22.343 14.953,21.835 16.604,20.184 16.604,7.874 v1(19.525,4.953) ; v1(25.685,95.06) 25.685,89.09 29.685,85.09 J2.1 ; v1(32.098,4.953) 32.724,4.953 33.114,5.343 33.114,7.874 33.428,8.188 34.057,8.817 35.322,7.551 35.951,8.18 34.686,9.446 35.273,10.033 38.703,13.463 J1.1
RS485_P: J1.2 J2.2 R10.1 R12.2 U2.7 | length 170
  Top Layer w0.381: v1(16.35,61.087) 21.684,61.087 22.256,61.658 22.256,62.039 22.7,62.484 23.208,62.484 23.43,62.262 23.43,61.881 23.716,61.595 24.224,61.595 24.52,61.891 24.52,62.315 24.097,62.738 24.097,63.5 25.494,64.897 28.034,64.897 28.462,64.469 R10.1 ; v1(19.081,94.678) 23.907,94.678 v1(24.478,94.107) ; v1(22.192,4.064) 22.319,4.191 v1(32.86,4.191) ; R12.2@25.922,62.738 R10.1 ; U2.7 29.304,61.896 R10.1
  Bottom Layer w0.381: v1(19.081,94.678) 16.223,91.821 16.223,65.151 16.35,65.024 v1(16.35,61.087) 16.35,49.976 15.08,48.706 15.08,22.606 17.239,20.447 17.239,8.391 21.566,4.064 v1(22.192,4.064) ; v1(24.478,94.107) 24.478,89.399 31.327,82.55 J2.2 ; v1(32.86,4.191) 36.797,8.128 36.797,10.414 40.353,13.97 40.353,15.621 38.838,17.136 37.424,17.136 J1.2
RST: ISP.5 R2.1 U1.29 | length 26.8
  Top Layer w0.508: R2.1 27.907,41.529 v1(28.415,41.021) 30.701,38.735 32.987,38.735 ISP.5 ; v1(33.749,53.848) 33.838,53.759 U1.29 U1.29@33.857,51.403
  Bottom Layer w0.508: v1(28.415,41.021) 28.415,41.783 33.749,47.117 v1(33.749,53.848)
RXD: U1.30 U2.1 | length 11.6
  Top Layer w0.508: U2.1 28.034,56.007 28.923,56.896 31.59,56.896 32.945,55.541 32.945,53.515 33.017,53.443 33.017,51.405 U1.30
SCK: ISP.3 U1.17 U6.3 | length 28.3
  Top Layer w0.508: U6.3 27.399,26.67 27.907,27.178 v1(31.59,27.178) ; v1(36.416,44.704) 36.736,44.384 U1.17
  Bottom Layer w0.508: v1(31.59,27.178) 31.59,28.377 34.638,31.425 34.638,35.235 35.797,36.394 35.797,39.005 ISP.3 37.305,40.513 37.305,43.815 v1(36.416,44.704)
SCL: R1.2 U1.28 U4.12 | length 35.7
  Top Layer w0.508: v1(29.05,75.565) U4.12@29.05,77.017 ; U1.28 34.638,58.039 v1(35.362,58.763) R1.2
  Bottom Layer w0.508: v1(29.05,75.565) 29.05,75.113 31.904,72.259 37.055,72.259 38.575,70.739 38.575,61.976 v1(35.362,58.763)
SDA: R1.3 U1.27 U4.13 | length 36.3
  Top Layer w0.508: v1(27.78,75.311) U4.13@27.78,77.017 ; U1.27 v1@35.438,57.442 ; v1(35.616,57.442) v1@35.438,57.442 ; R1.3 35.959,57.963 v1@35.438,57.442
  Bottom Layer w0.508: v1(27.78,75.311) 31.59,71.501 36.543,71.501 37.813,70.231 37.813,62.351 34.558,59.096 34.558,58.373 35.489,57.442 v1(35.616,57.442)
SN1: E1.B1 U4.6 | length 22.7
  Top Layer w0.508: v1(24.986,81.28) 26.002,81.28 27.526,79.756 35.527,79.756 36.67,78.613 U4.6@36.67,76.255
  Bottom Layer w0.508: 21.371,86.8 21,86.8 22.954,84.846 22.954,83.312 v1(24.986,81.28)
SN2: E2.B1 U4.8 | length 26.6
  Top Layer w0.508: 21,64.92 18.255,67.665 18.255,71.628 19.144,72.517 21.882,72.517 23.783,74.418 33.872,74.418 34.13,74.676 U4.8@34.13,76.255
SN3: E3.B1 U4.21 | length 40.3
  Top Layer w0.508: v1(25.113,67.31) 25.113,69.469 25.621,69.977 33.368,69.977 34.13,69.215 U4.21@34.13,68.017
  Bottom Layer w0.508: 21,42.7 22.863,42.7 23.293,43.13 23.293,47.964 25.032,49.703 25.032,67.229 v1(25.113,67.31)
SN4: E4.B1 U4.24 | length 75.7
  Top Layer w0.508: v1(16.477,23.749) 19.306,20.92 21,20.92 ; v1(22.708,68.461) 22.835,68.588 22.835,70.407 24.683,72.255 35.154,72.255 37.94,69.469 U4.24@37.94,68.017
  Bottom Layer w0.508: v1(16.477,23.749) 16.477,48.133 18.505,50.161 22.203,50.161 22.708,50.666 22.708,66.313 22.662,66.359 22.662,68.155 22.708,68.201 v1(22.708,68.461)
SN5: E5.B1 U4.4 | length 13.6
  Top Layer w0.508: U4.4@39.21,76.255 39.21,79.121 40.353,80.264 47.916,80.264 49,79.18
SN6: E6.B1 U4.27 | length 21.4
  Top Layer w0.508: U4.27@41.75,68.017 41.75,70.231 42.385,70.866 45.687,70.866 47.08,69.473 47.08,65.536 v1(47.338,65.278)
  Bottom Layer w0.508: v1(47.338,65.278) 47.38,65.236 47.38,64.183 47.338,64.141 47.338,58.962 49,57.3
SN7: E7.B1 U4.25 | length 46.2
  Top Layer w0.508: U4.25@39.21,68.017 39.21,66.802 41.242,64.77 v1(44.544,64.77) ; 49,35.08 52.319,35.08 v1(52.545,35.306)
  Bottom Layer w0.508: v1(44.544,64.77) 44.544,51.887 46.774,49.657 51.148,49.657 52.672,48.133 v1@52.672,35.56
SN8: E8.B1 U4.2 | length 71.1
  Top Layer w0.508: U4.2@41.75,77.017 41.75,75.311 v1(43.401,73.66)
  Bottom Layer w0.508: v1(43.401,73.66) 44.671,73.66 46.957,71.374 51.656,71.374 54.188,68.842 54.188,14.597
TXD: U1.31 U2.4 | length 3.2
  Top Layer w0.508: U2.4 31.844,53.538 32.233,53.149 32.233,51.389 U1.31
pads on no net: E1.A2 E1.B4 E2.A2 E2.B4 E3.A2 E3.B4 E4.A2 E4.B4 E5.A2 E5.B4 E6.A2 E6.B4 E7.A2 E7.B4 E8.A2 E8.B4 J1. J1.3 J1.6 J2. J2.3 J2.6 R1.4 R4.5 U1.7 U1.8 U1.13 U1.14 U1.19 U1.23 U1.24 U1.26 U4.11 U4.14
copper on no net: | length 61.2
  Top Layer w0.508: 49,10.76 53.272,10.76 54.196,11.684 ; 49,13.3 52.891,13.3 54.069,14.478
  Top Layer w1.5: 49,70 50.282,70 51.402,71.12 51.402,72.898 50.2,74.1 49,74.1
  Bottom Layer w1.5: 49,52.22 50.536,52.22 51.148,52.832 51.148,68.707 49.855,70 49,70 ; 49,74.1 50.572,74.1 51.656,75.184 51.656,90.424 50.2,91.88 49,91.88
  other v1: 14.572,58.928 14.699,67.31 14.699,72.39 14.572,76.2

## Polygon pours and split planes (outlines as drawn)
GND on Top Layer "Top Layer-No Net" (solid, remove dead copper, pour order 2): 0,0 70,0 70,120 0,120
GND on Bottom Layer "Top Layer-No Net" (solid, remove dead copper, pour order 3): 0,0 70,0 70,120 0,120

## Keep-outs
Keep-Out Layer:
  the board outline again, w0.254

## Other copper
Top Layer:
  rectangle net 5V: 41.369,44.958 46.195,52.959
  pour cut-out: 29.179,58.58 30.668,58.58 30.193,59.055 29.812,59.055
  pour cut-out: 31.604,63.838 32.309,63.838 31.971,63.5
  pour cut-out: 31.295,61.638 32.563,61.638 32.225,61.976 31.971,61.976
  pour cut-out: 44.798,57.531 44.798,55.499 44.163,55.499 43.909,55.753
  pour cut-out: 21,13.3 21,10.76 22.94,12.7
  pour cut-out: 44.036,34.417 44.036,33.02 43.909,33.02 43.274,33.655
  pour cut-out: 22,25 22.186,25 22.186,25.267 22,25.267
  pour cut-out: 42.893,20.193 39.591,20.193 40.607,21.209 42.385,21.209
  pour cut-out: 39.464,34.671 40.861,34.671 40.861,34.29 40.353,33.782
  pour cut-out: 25.615,68.524 36.599,68.524 36.599,69.469 36.345,69.723 25.367,69.723
  pour cut-out: 33.114,65.024 33.114,66.675 37.178,66.675 37.94,67.437 37.813,67.564 37.813,68.58 32.606,68.58 31.971,67.945
  pour cut-out: 25.949,77.917 25.949,74.852 26.383,74.418 26.514,74.549 30.828,74.549 30.828,78.142 30.535,78.435 30.332,78.232 26.383,78.232
  pour cut-out: 32.86,74.418 32.86,77.978 35.4,77.978 35.527,77.851 35.4,77.724 35.4,74.549
  pour cut-out: 36.67,76.255 37.94,76.255 37.94,77.067
  pour cut-out: 39.21,76.255 40.48,76.255 40.48,77.067
  pour cut-out: 41.75,77.851 43.02,77.851 43.02,77.017
  pour cut-out: 39.21,69.088 40.48,69.088 40.48,68.199
  pour cut-out: 41.75,66.802 43.147,66.802 43.147,67.691
Bottom Layer:
  pour cut-out: 44.036,33.02 44.036,34.671 44.018,34.308 43.291,33.581
  pour cut-out: 47.973,35.56 50.259,35.56 50.259,34.695 50.139,34.576
  pour cut-out: 21,45.24 19.172,45.24 19.525,45.593 19.525,46.101

## Silkscreen, mask and mechanical layers (free items; w line width, h text height)
Bottom Overlay:
  drawing of 1356 lines, arcs and shapes, not listed
  text "open hardware" at 96.647,71.694 h2
  text "Igor - Tool Armoury - V2" at 98.646,69.535 h2
  text "designed by" at 98.646,67.523 h2
  text "Luke Hovington" at 98.646,65.512 h2
  text "Joshua Hogendorn" at 98.646,63.5 h2
  text "HSBNE" at 94.996,50.866 h2

## Text inside footprints (layer, text, board x,y; h text height)
J1: Top Overlay "CHECK" at 30.32,11.049 h1.52
J2: Top Overlay "CHECK" at 39.591,88.646 h1.52 r180